# Altium PCB MDriveFinal.PcbDoc
Units mil, origin at the board's own origin, x right, y up, seen from the top; angles counter-clockwise.
Board outline 2550 x 2875 mil, 2 copper layers (Top Layer, Bottom Layer); 24 components, 55 nets, 181 pads, 41 vias.
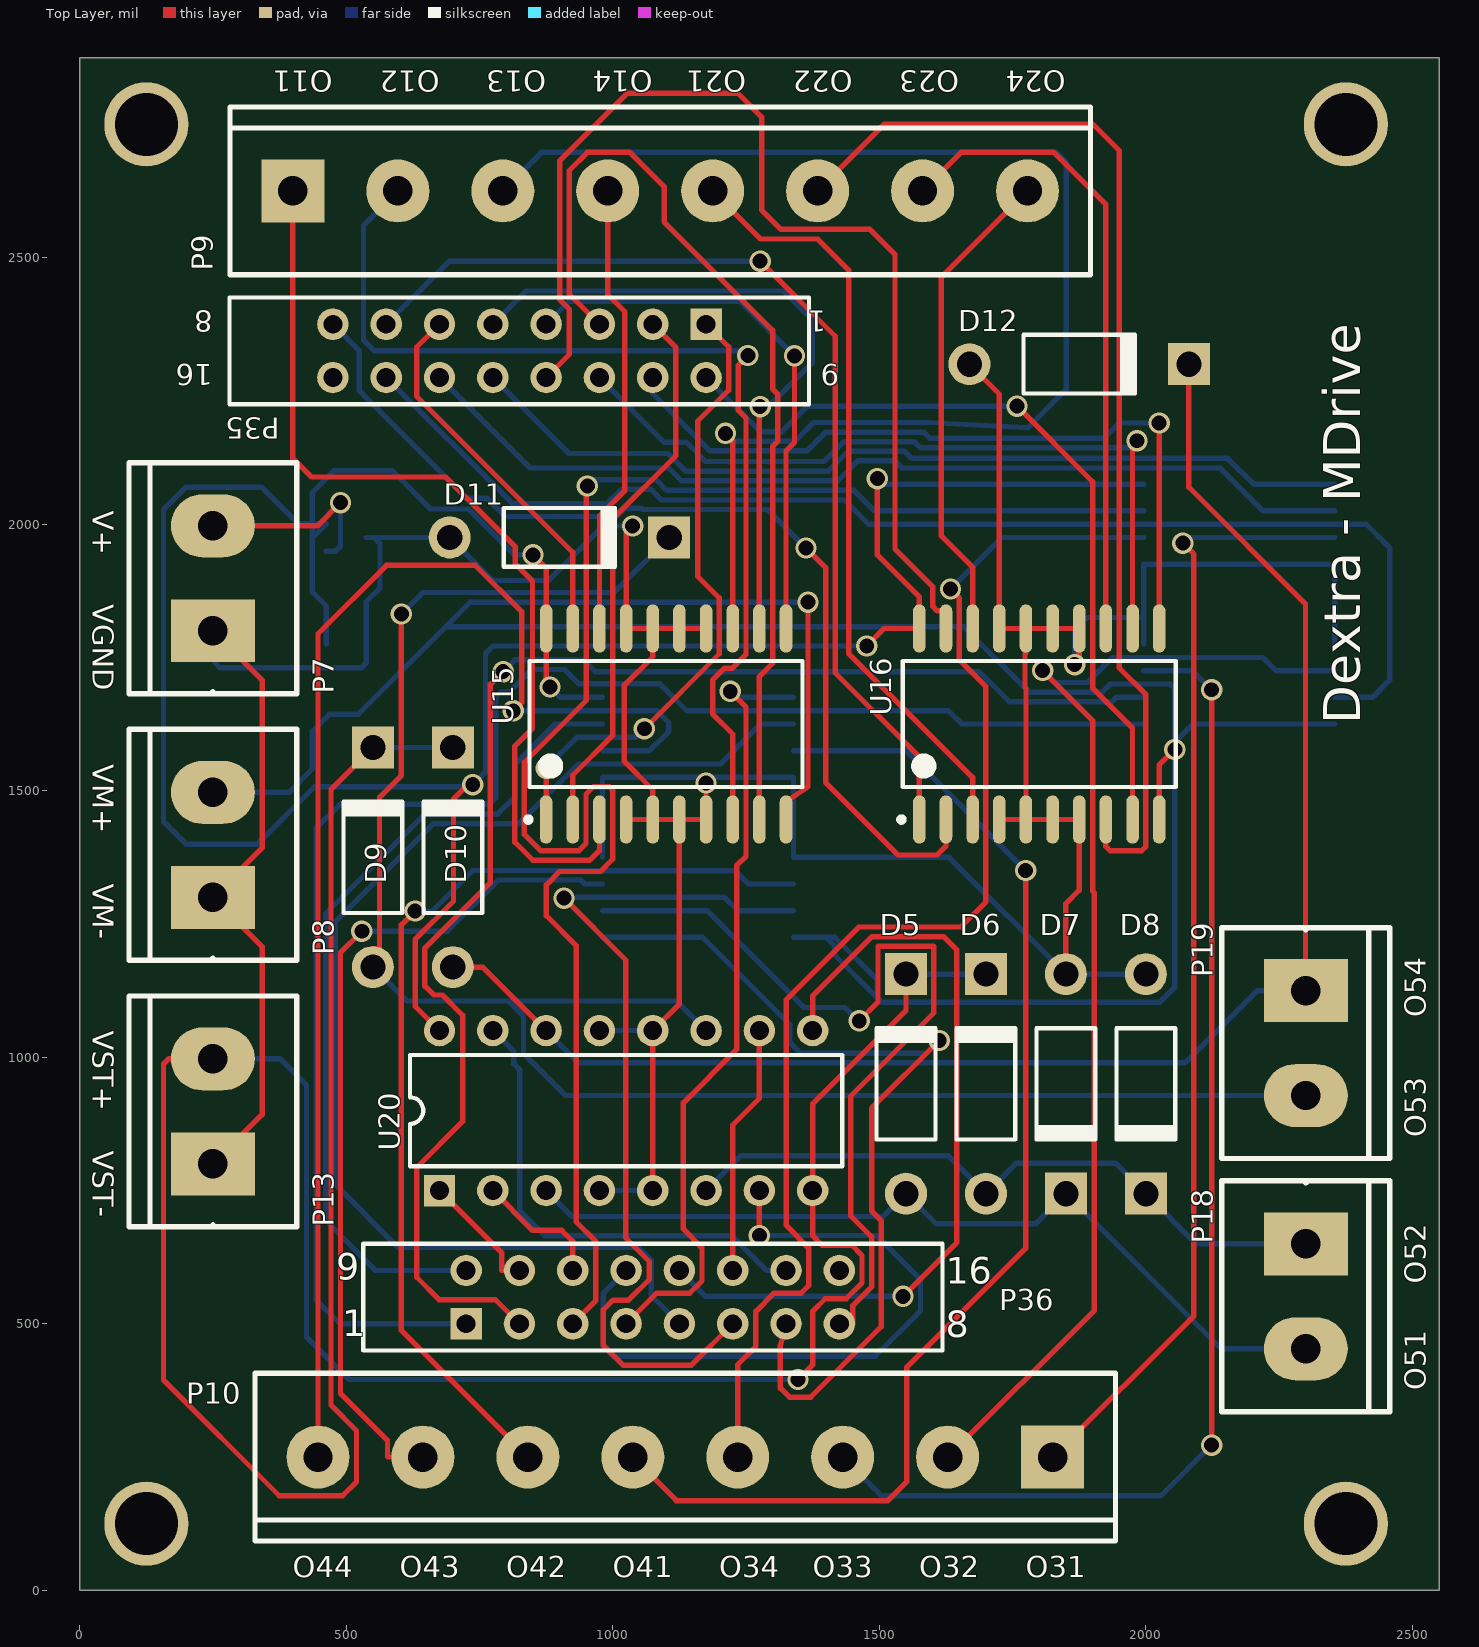
[diagram p0: Top Layer view]
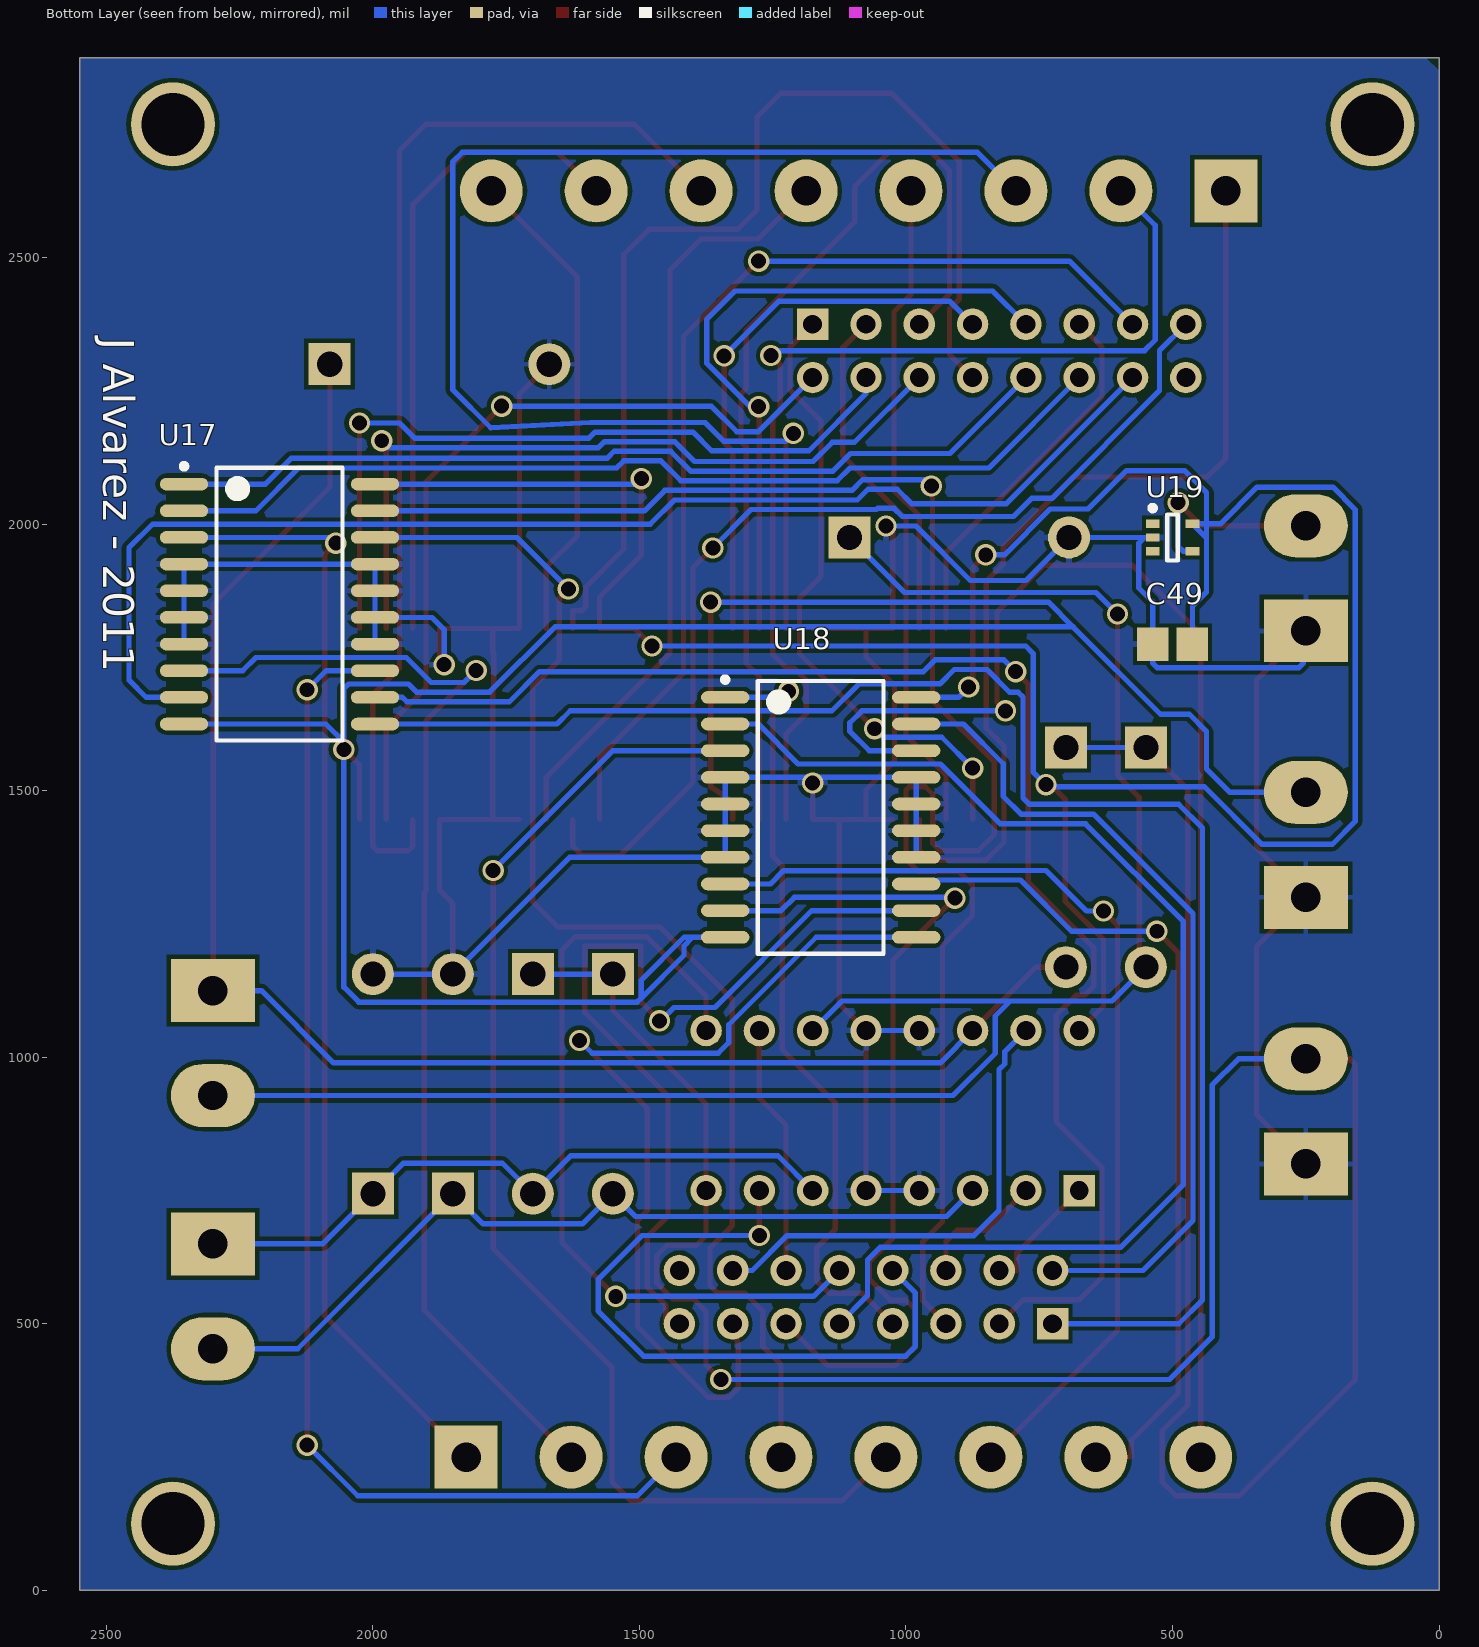
[diagram p1: Bottom Layer view, seen from below]

## Layer stack, top to bottom
Top Layer: signal copper 1.4
Dielectric: dielectric 12.6, FR-4, Dk 4.8
Bottom Layer: signal copper 1.4

## Board outline
0,2875 2550,2875 2550,0 0,0 0,2875

## Design rules (kind name [scope] priority, off if disabled: settings)
Clearance [All] p1: gap=8
HoleSize [All] p1: absolutevalues=TRUE maxlimit=118.11 minlimit=1 maxpercent=80.000 minpercent=20.000
MinimumSolderMaskSliver [All] p1: minsoldermaskwidth=4
PolygonConnect [All] p1: connectstyle=Relief reliefconductorwidth=10 reliefentries=4 polygonreliefangle="90 Angle"
RoomDefinition MDrive [InComponentClass('MDrive')] p1: confinementstyle=ConfineIn formatcopy=TRUE lockcomponents=FALSE outline 0,0 2550,0 2550,2875 0,2875
RoutingVias [All] p1: holewidth=28 width=40 viastyle="Through Hole" minholewidth=28 minwidth=40 maxholewidth=28 maxwidth=40
SMDNeckDown [All] p1: percent=75.000
SilkToSilkClearance [All] p1: silktosilkclearance=3
SilkscreenOverComponentPads [All] p1: minsilkscreentomaskgap=4
SolderMaskExpansion [All] p1: expansion=4
ViasUnderSMD [All] p1: allowed=FALSE
Width [All] p1: maxlimit=10 minlimit=8 preferedwidth=10
Width Width_VGND [InNet('VGND')] p2: maxlimit=15 minlimit=10 preferedwidth=10
Width Width_M [InNet('VM+')] p3: maxlimit=15 minlimit=10 preferedwidth=10
Width Width_S [InNet('VSTP+')] p4: maxlimit=15 minlimit=10 preferedwidth=10
24 further rules are at their usual default settings.

## Components (designator, comment, footprint, x,y, rotation, side; value= is the part's Value field where it differs from the comment)
C49 "Cap Semi" CAPC2012M 500,1775 r0 bottom
D5 "Diode 1N4002" DO-41 1550,950 r90 top
D6 "Diode 1N4002" DO-41 1700,950 r90 top
D7 "Diode 1N4002" DO-41 1850,950 r270 top
D8 "Diode 1N4002" DO-41 2000,950 r270 top
D9 "Diode 1N4002" DO-41 550,1375 r90 top
D10 "Diode 1N4002" DO-41 700,1375 r90 top
D11 "Diode 1N4002" DO-41 900,1975 r0 top
D12 "Diode 1N4002" DO-41 1875,2300 r0 top
P7 "VIN" AZUL5-2 250,1800 r90 top
P8 "VMDC" AZUL5-2 250,1300 r90 top
P9 "Motor 1-4" AZUL5-8 400,2625 r0 top
P10 "Motor 2-8" AZUL5-8 1825,250 r180 top
P13 "VSTP" AZUL5-2 250,800 r90 top
P18 "STPAB" AZUL5-2 2300,650 r270 top
P19 "STPCD" AZUL5-2 2300,1125 r270 top
P35 "SHEADER 2x8" "SHBH 2X8" 1175,2375 r180 top
P36 "SHEADER 2x8" "SHBH 2X8" 725,500 r0 top
U15 "L293DD" SO20_N 1100,1625 r90 top
U16 "L293DD" SO20_N 1800,1625 r90 top
U17 "L293DD" SO20_N 2175,1850 r180 bottom
U18 "L293DD" SO20_N 1160,1450 r180 bottom
U19 "TPS71550" SOT353-5L 500,1975 r180 bottom
U20 "L293B" DIP16 1025,900 r0 top

## Footprints (in the part's own frame and the unit in brackets; to place one, negate y for a bottom-side part, rotate by r counter-clockwise, add the part's x,y. Pads: shape width x height; smd on the part's side, far side on the other; paste and mask are expansions set on the pad)
AZUL5-2 [mm]
  rect 3x4 hole 1.4: 1(0,0)
  oval 3x4 hole 1.4: 2(5,0)
  silkscreen extent -3,-4 8,4
AZUL5-8 [mm]
  rect 3x3 hole 1.4: 1(0,0)
  round 3 hole 1.4: 2(5,0) 3(10,0) 4(15,0) 5(20,0) 6(25,0) 7(30,0) 8(35,0)
  silkscreen extent -3,-4 38,4
CAPC2012M [mm] "Chip Capacitor, Body 2.0x1.3mm, IPC Low Density"
  rect 1.5x1.6 smd: 1(-0.95,0) 2(0.95,0)
  body extent -1.1,-0.72 1.1,0.72, height 1.1
DIP16 [mm] "DIP; 16 Leads; Row Spacing 7.62 mm; Pitch 2.54 mm"
  rect 1.5x1.5 hole 0.9: 1(-8.89,-3.81)
  round 1.5 hole 0.9: 2(-6.35,-3.81) 3(-3.81,-3.81) 4(-1.27,-3.81) 5(1.27,-3.81) 6(3.81,-3.81) 7(6.35,-3.81) 8(8.89,-3.81) 9(8.89,3.81) 10(6.35,3.81) 11(3.81,3.81) 12(1.27,3.81) 13(-1.27,3.81) 14(-3.81,3.81) 15(-6.35,3.81) 16(-8.89,3.81)
  silkscreen extent -10.3,-2.65 10.3,2.65
DO-41 [mm] "Diode, Axial; Body 5.2 x 2.7 mm (LxDia. max), Lead Dia. 0.86 mm (max)"
  round 2 hole 1.2: 1(-5.23,0)
  rect 2x2 hole 1.2: 2(5.23,0)
  silkscreen extent -2.65,-1.4 2.75,1.4
"SHBH 2X8" [mm] "Shrouded Box Header: 2x8-Pin, 0.100\" (2.54 mm) Male"
  rect 1.5x1.5 hole 0.9: 1(0,0)
  round 1.5 hole 0.9: 2(2.54,0) 3(5.08,0) 4(7.62,0) 5(10.16,0) 6(12.7,0) 7(15.24,0) 8(17.78,0) 9(0,2.54) 10(2.54,2.54) 11(5.08,2.54) 12(7.62,2.54) 13(10.16,2.54) 14(12.7,2.54) 15(15.24,2.54) 16(17.78,2.54)
  silkscreen extent -4.9,-1.27 22.7,3.81
SO20_N [mm] "SOIC, 20-Leads, Body 12.8x7.5mm, Pitch 1.27mm, IPC Medium Density"
  oval 2.3x0.6 smd: 1(-4.55,5.715) 2(-4.55,4.445) 3(-4.55,3.175) 4(-4.55,1.905) 5(-4.55,0.635) 6(-4.55,-0.635) 7(-4.55,-1.905) 8(-4.55,-3.175) 9(-4.55,-4.445) 10(-4.55,-5.715) 11(4.55,-5.715) 12(4.55,-4.445) 13(4.55,-3.175) 14(4.55,-1.905) 15(4.55,-0.635) 16(4.55,0.635) 17(4.55,1.905) 18(4.55,3.175) 19(4.55,4.445) 20(4.55,5.715)
  silkscreen extent -4.67,-6.5 3,6.69, body extent -3.75,-6.4 3.75,6.4, height 2.65
SOT353-5L [mm] "SOT353, 5-Leads, Body 2x1.3mm, Pitch 0.65mm, Lead Span 2.1mm, IPC High Density"
  rect 0.65x0.4 smd: 1(-0.95,0.65) 2(-0.95,0) 3(-0.95,-0.65) 4(0.95,-0.65) 5(0.95,0.65)
  silkscreen extent -1.07,-1.1 0.25,1.52, body extent -0.7,-1.1 0.7,1.1, height 1.1

## Part data
C49: "Capacitor (Semiconductor SIM Model)"
D5 D6 D7 D8 D9 D10 D11 D12: "1 Amp General Purpose Rectifier"
P7 P8 P13 P18 P19: library part "Header 2", "Header, 2-Pin"
P9 P10: library part "Header 8", "Header, 8-Pin"
P35 P36: library part "SB Header 2x8", "Shrouded Box Header: 2x8-Pin, 0.100\" (2.54 mm) Male"
U15 U16 U17 U18: "Push-Pull Four Channel Driver With Diode"
U20: "Push-Pull Four Channel Drivers"

## Free pads (board coordinates)
  round 157.48 hole 118.11: 17(125,2750) 18(125,125) 19(2375,125) 19(2375,2750)

## Via types
v1: diameter 40, hole 28, Top Layer to Bottom Layer, 41 vias

## Nets (pads, with @x,y where several pads share a name; then routed paths per layer and width w, separated by ;. In a path a pad name is that pad's centre, name@x,y a point inside that pad or via, vN(x,y) a via of type N, cw(c..) or ccw(c..) an arc to the next point about the centre after c; other vN are vias at no path point)
EN11: P35.1 U15.1 | length 1186.7
  Top Layer w10: U15.1 v1(875,1542.37) ; v1(1059.19,1616.19) 1199.81,1756.81 1199.81,1861.72 1159.49,1902.04 1159.49,2193.34 1217.53,2251.37 1217.53,2332.47 P35.1
  Bottom Layer w10: v1(875,1542.37) 932.82,1600.19 1043.19,1600.19 v1(1059.19,1616.19)
EN12: P35.4 U15.11 | length 1044.7
  Top Layer w10: U15.11 1325,2137.37 1341,2153.37 v1(1341,2315.74)
  Bottom Layer w10: P35.4 918.37,2418.37 1238.37,2418.37 v1(1341,2315.74)
EN21: P35.7 U16.1 | length 1921.6
  Top Layer w10: v1(1276.4,2493.37) 1417.37,2352.4 1417.37,1721 1575,1563.37 U16.1
  Bottom Layer w10: P35.7 693.37,2493.37 v1(1276.4,2493.37)
EN22: P35.10 U16.11 | length 1441.3
  Top Layer w10: U16.11 v1(2025,2189.71)
  Bottom Layer w10: P35.10 1075,2244.79 1182.42,2137.37 1364.35,2137.37 1399.61,2172.63 1583.37,2172.63 1594.63,2161.37 1921.66,2161.37 1950,2189.71 v1(2025,2189.71)
EN31: P35.13 U17.1 | length 1692.8
  Bottom Layer w10: P35.13 917.63,2132.37 1103.74,2132.37 1136.74,2099.37 1404.19,2099.37 1441.46,2136.63 1547.37,2136.63 1560.63,2123.37 2153.37,2123.37 2201.74,2075 U17.1
EN32: P36.1 U17.11 | length 3013.5
  Bottom Layer w10: P36.1 488.37,500 443.63,544.74 443.63,1429.63 488.37,1474.37 768.37,1474.37 780.37,1486.37 780.37,1675.37 789.64,1684.64 805.64,1684.64 848.37,1727.37 909.37,1727.37 936.37,1700.37 1088.37,1700.37 1138.74,1650 1629.74,1650 1654.74,1625 U17.11
EN41: P36.4 U18.1 | length 1480.5
  Top Layer w10: P36.4 1082.47,557.47 1144.37,557.47 1167.53,580.63 1167.53,642.53 1132.37,677.69 1132.37,914.37 1232.37,1014.37 1232.37,1359.37 1249.81,1376.81 1249.81,1656.93 v1(1220.37,1686.37)
  Bottom Layer w10: v1(1220.37,1686.37) 1231.74,1675 U18.1
EN42: P36.7 U18.11 | length 1720.9
  Top Layer w10: P36.7 1314.37,459.74 1314.37,379.37 1331.37,362.37 1371.37,362.37 1503.53,494.53 1503.53,693.47 1485.53,711.47 1485.53,904.53 v1(1612.37,1031.37)
  Bottom Layer w10: U18.11 1168.37,1225 1332.37,1061 1332.37,1027.47 1352.37,1007.47 1588.47,1007.47 v1(1612.37,1031.37)
EN51: P36.10 U20.1 | length 231.5
  Top Layer w10: U20.1 792,633 792,600 P36.10
EN52: P36.13 U20.9 | length 1522.9
  Top Layer w10: U20.9 1375,1114.64 1486.64,1226.28 1620.37,1226.28 1645.37,1201.28 1645.37,652.37 v1(1544.37,551.37)
  Bottom Layer w10: P36.13 1173.63,551.37 v1(1544.37,551.37)
IN11: P35.2 U15.2 | length 1027.2
  Top Layer w10: U15.2 925,1528.89 999.81,1603.7 999.81,2009.65 1118.37,2128.21 1118.37,2331.63 P35.2
IN12: P35.3 U15.9 | length 1820.4
  Top Layer w10: P35.3 918.37,2431.63 918.37,2663.37 952.37,2697.37 1032.37,2697.37 1096.29,2633.45 1096.29,2567.03 1299.81,2363.5 1299.81,2253.37 1309.37,2243.81 1309.37,2155.37 1299.81,2145.81 1299.81,1739 1275,1714.18 U15.9
IN13: P35.5 U15.12 | length 1277
  Top Layer w10: U15.12 1275,2219 v1(1276.37,2220.37)
  Bottom Layer w10: P35.5 837.37,2437.37 1320.37,2437.37 1374,2383.74 1374,2302 1292.37,2220.37 v1(1276.37,2220.37)
IN14: P35.6 U15.19 | length 709.7
  Top Layer w10: P35.6 632.37,2332.37 632.37,2239.62 925,1946.99 U15.19
IN21: P35.8 U16.2 | length 1911.9
  Top Layer w10: v1(1362.37,1955.37) 1399.37,1918.37 1399.37,1515.37 1535.37,1379.37 1608.37,1379.37 1625,1396 U16.2
  Bottom Layer w10: P35.8 524.37,2325.63 524.37,2250.37 726.32,2048.42 764.47,2048.42 798.52,2014.37 1007.02,2014.37 1022.17,2029.52 1053.37,2029.52 1055.52,2027.37 1290.37,2027.37 v1(1362.37,1955.37)
IN22: P35.9 U16.9 | length 1510.6
  Top Layer w10: v1(1758.37,2221.37) 1900.19,2079.55 1900.19,1692.37 1975,1617.56 U16.9
  Bottom Layer w10: P35.9 1276.63,2173.37 1317.37,2173.37 1365.37,2221.37 v1(1758.37,2221.37)
IN23: P35.11 U16.12 | length 1454.8
  Top Layer w10: U16.12 1975,2148 v1(1983.37,2156.37)
  Bottom Layer w10: P35.11 1096.48,2153.52 1138.04,2153.52 1174.19,2117.37 1396.6,2117.37 1433.86,2154.63 1565.37,2154.63 1576.63,2143.37 1970.37,2143.37 v1(1983.37,2156.37)
IN24: P35.12 U16.19 | length 2091.8
  Top Layer w10: P35.12 918.37,2318.37 918.37,2403.37 900.37,2421.37 900.37,2681.37 1027.37,2808.37 1234.37,2808.37 1279.37,2763.37 1279.37,2589.37 1315.8,2552.94 1482.37,2552.94 1529.37,2505.94 1529.37,1953.37 1600.37,1882.37 1600.37,1845.37 1608.37,1837.37 1625,1837.37 U16.19
IN31: P35.14 U17.2 | length 1813.6
  Bottom Layer w10: P35.14 844.63,2105.37 1105.02,2105.37 1129.02,2081.37 1422.19,2081.37 1459.46,2118.63 1529.37,2118.63 1542.63,2105.37 2139.37,2105.37 2219.74,2025 U17.2
IN32: P35.15 U17.9 | length 2402
  Bottom Layer w10: P35.15 811.63,2038.37 989.37,2038.37 1016.37,2065.37 1071.37,2065.37 1091.37,2045.37 1434.37,2045.37 1479.93,1999.81 2413.37,1999.81 2457.37,1955.81 2457.37,1707.37 2425,1675 U17.9
IN33: P36.2 U17.12 | length 2746.4
  Top Layer w10: v1(794.37,1723.37) 770.37,1699.37 770.37,1327.47 647.63,1204.72 647.63,1133.46 664.37,1116.72 680.37,1116.72 718.37,1078.72 718.37,879.37 632.37,793.37 632.37,587.37 674.37,545.37 779.63,545.37 P36.2
  Bottom Layer w10: v1(794.37,1723.37) 816.37,1745.37 945.22,1745.37 967.22,1723.37 1687.37,1723.37 1743.88,1666.86 1936.19,1666.86 1944.33,1675 U17.12
IN34: P36.3 U17.19 | length 3213.7
  Top Layer w10: P36.3 968.37,543.37 968.37,654.37 931.37,691.37 931.37,1209.37 875.37,1265.37 875.37,1323.37 900.37,1348.37 976.81,1348.37 999.81,1371.37 999.81,1501.42 993.86,1507.37 963.83,1507.37 949.81,1493.36 949.81,1401.03 936.37,1387.59 864.37,1387.59 834.26,1417.7 834.26,1553.3 950.19,1669.22 950.19,2069.19 v1(952.37,2071.37)
  Bottom Layer w10: v1(952.37,2071.37) 964.37,2083.37 1081.02,2083.37 1101.02,2063.37 1452.37,2063.37 1490.74,2025 U17.19
IN41: P36.5 U18.2 | length 2299
  Bottom Layer w10: P36.5 1072.11,552.89 1072.11,619.63 1048.37,643.37 597.37,643.37 479.63,761.11 479.63,1254.5 662.99,1437.86 822.86,1437.86 935.19,1550.19 1202.19,1550.19 1277,1625 U18.2
IN42: P36.6 U18.9 | length 1690.5
  Top Layer w10: v1(908.37,1298.37) 1024.37,1182.37 1024.37,660.77 1068.71,616.43 1068.71,583.57 1029.51,544.37 1000.37,544.37 982.37,526.37 982.37,459.37 1019.78,421.96 1146.96,421.96 P36.6
  Bottom Layer w10: v1(908.37,1298.37) 910,1300 1209.37,1300 1234.37,1275 U18.9
IN43: P36.8 U18.12 | length 1655.5
  Top Layer w10: P36.8 1450.37,500 1450.37,534.02 1485.53,569.17 1485.53,663.21 1446.37,702.37 1446.37,927.37 1602.37,1083.37 1602.37,1208.28 1497.37,1208.28 1497.37,1103.37 v1(1462.37,1068.37)
  Bottom Layer w10: U18.12 1176.74,1275 1358.37,1093.37 1435.37,1093.37 1460.37,1068.37 v1(1462.37,1068.37)
IN44: P36.9 U18.19 | length 1580.2
  Bottom Layer w10: P36.9 555.32,600 461.63,693.69 461.63,1269.37 648.18,1455.92 784.05,1455.92 817.5,1489.37 817.5,1550.5 892,1625 U18.19
IN51: P36.11 U20.2 | length 244.2
  Top Layer w10: U20.2 849.63,675.37 904.37,675.37 925,654.74 P36.11
IN52: P36.12 U20.7 | length 1277.7
  Top Layer w10: v1(1275,665.74) U20.7
  Bottom Layer w10: P36.12 982.37,557.37 982.37,457.37 1000.37,439.37 1492.37,439.37 1577.37,524.37 1577.37,583.37 1495,665.74 v1(1275,665.74)
IN53: P36.14 U20.10 | length 470.7
  Top Layer w10: P36.14 1225,873 1275,923 U20.10
IN54: P36.15 U20.15 | length 904.7
  Bottom Layer w10: U20.15 814.47,1010.53 814.47,987.71 825.37,976.81 825.37,712.37 872.37,665.37 1223,665.37 1288.37,600 P36.15
OUT11: P9.1 U15.3 | length 1807.2
  Top Layer w10: P9.1 400,2123.37 435,2088.37 686.37,2088.37 817.37,1957.37 817.37,1925.37 849.37,1893.37 849.37,1616.88 816.26,1583.78 816.26,1403.3 849.97,1369.59 957,1369.59 975,1387.59 U15.3
OUT12: P9.2 U15.8 | length 1973.1
  Top Layer w10: U15.8 1225,1606.37 1187.37,1644 1187.37,1707.37 1209.81,1729.81 1224.37,1729.81 1249.81,1755.25 1249.81,2198.93 1235.53,2213.21 1235.53,2298.53 v1(1253.37,2316.37)
  Bottom Layer w10: P9.2 532.37,2560.52 532.37,2345.37 552.37,2325.37 1244.37,2325.37 v1(1253.37,2316.37)
OUT13: P9.3 U15.13 | length 2582.7
  Top Layer w10: v1(1211.37,2170.37) 1225,2156.74 U15.13
  Bottom Layer w10: P9.3 866.07,2697.37 1832.37,2697.37 1850.37,2679.37 1850.37,2252.29 1778.92,2180.84 1591.58,2190.63 1376.63,2190.63 1341.37,2155.37 1226.37,2155.37 v1(1211.37,2170.37)
OUT14: P9.4 U15.18 | length 853.9
  Top Layer w10: U15.18 975,2015.75 1022.62,2063.37 1022.62,2398.3 990.55,2430.37 P9.4
OUT21: P9.5 U16.3 | length 1443.7
  Top Layer w10: P9.5 1277.46,2534.94 1384.37,2534.94 1442.57,2476.74 1442.57,1757.53 1675,1525.1 U16.3
OUT22: P9.6 U16.8 | length 2096.4
  Top Layer w10: P9.6 1509.62,2750.37 1900.37,2750.37 1950,2700.74 1950,1730.37 2000,1680.37 2000,1395.37 1992,1387.37 1933,1387.37 1925,1395.37 U16.8
OUT23: P9.7 U16.13 | length 1209.9
  Top Layer w10: P9.7 1653.47,2697.37 1827.37,2697.37 1925,2599.74 U16.13
OUT24: P9.8 U16.18 | length 912.1
  Top Layer w10: U16.18 1675,1919.37 1616.37,1978 1616.37,2463.42 P9.8
OUT31: P10.1 U17.3 | length 2121.8
  Top Layer w10: P10.1 2090,515 2090,1943.74 v1(2069.37,1964.37)
  Bottom Layer w10: v1(2069.37,1964.37) 2080,1975 U17.3
OUT32: P10.2 U17.8 | length 2216.4
  Top Layer w10: P10.2 1903.37,525.22 1903.37,1308.37 1900.19,1311.55 1900.19,1631.55 v1(1806.37,1725.37)
  Bottom Layer w10: v1(1806.37,1725.37) 1828.88,1702.86 1890.42,1702.86 1937.37,1749.81 2219.56,1749.81 2244.37,1725 U17.8
OUT33: P10.3 U17.13 | length 2320.8
  Top Layer w10: v1(2123.37,272.37) v1(2123.37,1689.37)
  Bottom Layer w10: P10.3 1503.93,177.37 2028.37,177.37 v1(2123.37,272.37) ; U17.13 2087.74,1725 v1(2123.37,1689.37)
OUT34: P10.4 U17.18 | length 2427.8
  Top Layer w10: P10.4 1234.45,423.45 1268.37,457.37 1268.37,523.37 1302.47,557.47 1353.63,557.47 1367.53,571.37 1367.53,642.53 1325.63,684.43 1325.63,1108.28 1461.63,1244.28 1652.72,1244.28 1699.81,1291.37 1699.81,1695.75 1650.19,1745.37 1650.19,1861.55 v1(1633.37,1878.37)
  Bottom Layer w10: v1(1633.37,1878.37) 1730,1975 U17.18
OUT41: P10.5 U18.3 | length 2329.7
  Top Layer w10: P10.5 1119.23,168.37 1516.37,168.37 1551.37,203.37 1551.37,418.37 1774.37,641.37 v1(1774.37,1350.37)
  Bottom Layer w10: U18.3 1549.74,1575 v1(1774.37,1350.37)
OUT42: P10.6 U18.8 | length 1885.2
  Top Layer w10: v1(629.37,1274.37) 603.37,1248.37 603.37,487.38 P10.6
  Bottom Layer w10: v1(629.37,1274.37) 661.37,1274.37 737.37,1350.37 944.19,1350.37 944.56,1350 1229.37,1350 1254.37,1325 U18.8
OUT43: P10.7 U18.13 | length 1600.2
  Top Layer w10: v1(529.37,1236.37) 489.37,1196.37 489.37,369.37 577.37,281.37 577.37,250 P10.7
  Bottom Layer w10: v1(529.37,1236.37) 689.37,1236.37 785.37,1332.37 940,1332.37 947.37,1325 U18.13
OUT44: P10.8 U18.18 | length 2664.6
  Top Layer w10: P10.8 447.05,1794.31 575.37,1922.63 742.11,1922.63 829.37,1835.37 829.37,1665.81 v1(813.37,1649.81)
  Bottom Layer w10: v1(813.37,1649.81) 1082.75,1649.81 1105.19,1627.37 1105.19,1611.37 1068.82,1575 U18.18
OUT51: D5.1 D7.2 P18.2 U20.3 | length 1630.3
  Bottom Layer w10: U20.3 923.63,701.37 1507.28,701.37 D5.1 1606.72,687.37 1793.28,687.37 D7.2 2140.94,453.15 P18.2
OUT52: D6.1 D8.2 P18.1 U20.6 | length 1268.1
  Bottom Layer w10: U20.6 1240.49,815.49 1628.6,815.49 D6.1 1757.28,801.37 1942.72,801.37 D8.2 2094.09,650 P18.1
OUT53: D9.1 D11.2 P19.2 U20.11 | length 3538
  Top Layer w10: D9.1 550,1203.37 562.37,1203.37 562.37,1487.37 603.37,1528.37 v1(603.37,1831.37)
  Bottom Layer w10: D9.1 613.72,1105.37 804.37,1105.37 ; v1(603.37,1831.37) 643.73,1871.73 1002.64,1871.73 D11.2 ; U20.11 1119.63,1105.37 804.37,1105.37 ; P19.2 911.69,928.15 832.47,1007.37 832.47,1077.27 804.37,1105.37
OUT54: D10.1 D12.2 P19.1 U20.14 | length 2997.4
  Top Layer w10: D10.1 755.91,1169.09 U20.14 ; D12.2 2080.37,2300 2080.37,2069.37 2299.37,1850.37 2299.37,1125 P19.1
  Bottom Layer w10: U20.14 935.53,989.47 2073.47,989.47 2209,1125 P19.1
V+: P7.2 U19.4 | length 369.9
  Top Layer w10: P7.2 445.85,1996.85 v1(489.37,2040.37)
  Bottom Layer w10: U19.4 480.37,1949.41 489.37,1958.41 v1(489.37,2040.37)
VCC: C49.1 U15.20 U16.20 U17.20 U18.20 U19.5 U20.16 | length 5213.7
  Top Layer w10: U20.16 629.37,1095.63 629.37,1220.6 701.37,1292.6 701.37,1484.37 728.37,1511.37 v1(737.37,1511.37) v1@733.37,1507.37 ; v1(850.37,1942.37) 875,1917.74 U15.20 875,1701.74 v1(882.37,1694.37) ; v1(1476.37,1771.37) 1509.13,1804.13 U16.20 1575,1863.37 1496.37,1942 v1(1496.37,2085.37)
  Bottom Layer w10: C49.1 462.6,1846.14 436.37,1872.37 436.37,1974.36 ; v1@733.37,1507.37 440.37,1507.37 332.37,1399.37 200.37,1399.37 157.37,1442.37 157.37,2027.37 199.37,2069.37 341.37,2069.37 410.15,2000.59 436.37,2000.59 ; v1(737.37,1511.37) 761.37,1535.37 761.37,1757.37 775.37,1771.37 v1(1476.37,1771.37) ; v1(850.37,1942.37) 815.47,1942.37 729.47,2028.37 658.37,2028.37 586.37,2100.37 477.37,2100.37 436.37,2059.37 436.37,2000.59 ; v1(882.37,1694.37) 901.74,1675 U18.20 ; v1(1496.37,2085.37) 1506.74,2075 U17.20 ; 436.37,1974.36 436.37,2000.59 ; 436.37,1974.36 U19.5 436.37,2000.59
VGND: C49.2 D7.1 D8.1 D11.1 D12.1 P7.1 P8.1 P13.1 U15.4 U15.5 U15.6 U15.7 U15.14 U15.15 U15.16 U15.17 U16.4 U16.5 U16.6 U16.7 U16.14 U16.15 U16.16 U16.17 U17.4 U17.5 U17.6 U17.7 U17.14 U17.15 U17.16 U17.17 U18.4 U18.5 U18.6 U18.7 U18.14 U18.15 U18.16 U18.17 U19.2 U20.4 U20.5 U20.12 U20.13 | length 8058.3
  Top Layer w10: P13.1 342.37,892.37 342.37,1207.63 P8.1 342.37,1392.37 342.37,1707.63 P7.1 ; U15.4 U15.5 ; v1(1037.37,1996.37) 1025,1984 U15.17 U15.16 ; U20.5 U20.12 1125,1100 U15.6 ; v1(1175,1514.37) U15.7 U15.6 ; U15.14 U15.15 U15.16 ; D12.1 1725,2244.09 U16.17 U16.16 ; U16.4 U16.5 ; D7.1 1850,1288.37 1875,1313.37 U16.7 U16.6 U16.5 ; v1(1866.37,1736.37) 1875,1745 U16.14 U16.15 U16.16 ; U15.5 U15.6 ; U15.5 1075,1501.74 1021.37,1555.37 1021.37,1697.37 1075,1751 U15.16 ; U16.5 1775,1692.37 1773.37,1694 1773.37,1756.74 1775,1758.37 U16.16
  Bottom Layer w10: P7.1 254.37,1800 254.37,1739.37 263.34,1730.4 528.43,1730.4 537.4,1739.37 C49.2 537.4,1854.4 563.37,1880.37 563.37,1964 552.37,1975 ; U19.2 552.37,1975 ; U20.4 U20.5 ; U20.13 U20.12 ; U18.14 U18.15 U18.16 U18.17 v1@1185.63,1525 ; v1(1037.37,1996.37) 981.37,1996.37 879.37,1894.37 774.72,1894.37 D11.1 552.37,1975 ; v1(1175,1514.37) v1@1185.63,1525 ; v1(1866.37,1736.37) 1866.37,1802 1889.37,1825 U17.15 ; U17.14 U17.15 ; D8.1 D7.1 1630.91,1375 U18.7 U18.6 U18.5 U18.4 v1@1185.63,1525 ; U17.7 U17.6 U17.5 U17.4 U17.17 U17.16 U17.15
VM+: P8.2 U15.10 U16.10 U17.10 U18.10 | length 5131.7
  Top Layer w10: U15.10 1325,1479.37 1366.37,1507.37 v1(1366.37,1853.6) ; U16.10 2025,1548 v1(2054.37,1577.37)
  Bottom Layer w10: P8.2 392.37,1496.85 436.37,1540.85 436.37,1611.37 468.37,1643.37 522.37,1643.37 686.37,1807.37 ; U18.10 1400.37,1225 ; v1(1366.37,1853.6) 732.6,1853.6 686.37,1807.37 ; U17.10 2088.37,1625 v1@2054.37,1591 ; 686.37,1807.37 1658.37,1807.37 1780.88,1684.86 1918.19,1684.86 1933.52,1700.19 2045.55,1700.19 2054.37,1691.37 v1@2054.37,1591 ; 1400.37,1225 1416.37,1225 1496.37,1145 1496.37,1111.37 ; 1400.37,1225 1416.37,1209 1416.37,1191.37 1496.37,1111.37 ; 1496.37,1111.37 1504.37,1103.37 2026.37,1103.37 2054.37,1131.37 v1(2054.37,1577.37) v1@2054.37,1591
VSTP+: D5.2 D6.2 D9.2 D10.2 P13.2 U20.8 | length 5482
  Top Layer w10: P13.2 166.85,996.85 157.37,987.37 157.37,394.37 374.37,177.37 493.37,177.37 519.37,203.37 519.37,299.37 471.37,347.37 471.37,1502.28 D9.2 ; v1(1347.37,395.37) 1375,423 1375,523.37 1398.57,546.94 1437.84,546.94 1467.53,576.63 1467.53,628.14 1448.37,647.29 1393,647.29 1375,665.29 U20.8 1375,912.55 1550,1087.55 D5.2
  Bottom Layer w10: P13.2 376.37,996.85 425.63,947.59 425.63,475.11 505.37,395.37 v1(1347.37,395.37) ; D9.2 D10.2 ; D5.2 D6.2
pads on no net: P35.16 P36.16 U19.1 U19.3

## Polygon pours and split planes (outlines as drawn)
VGND on Bottom Layer "Bottom Overlay-No Net" (solid, pour order 2): 0,2875 2550,2875 2550,0 0,0 0,2850 25,2875

## Silkscreen, mask and mechanical layers (free items; w line width, h text height)
Top Overlay:
  text "O11" at 475,2850 h39.37 r180
  text "O12" at 675,2850 h39.37 r180
  text "O13" at 875,2850 h39.37 r180
  text "O14" at 1075,2850 h39.37 r180
  text "O21" at 1250,2850 h39.37 r180
  text "O22" at 1450,2850 h39.37 r180
  text "O23" at 1650,2850 h39.37 r180
  text "O24" at 1850,2850 h39.37 r180
  text "V+" at 25,2025 h39.37 r270
  text "VGND" at 25,1850 h39.37 r270
  text "Dextra - MDrive" at 2425,1625 h118.11 r90
  text "VM+" at 25,1550 h39.37 r270
  text "VM-" at 25,1325 h39.37 r270
  text "O54" at 2525,1075 h39.37 r90
  text "VST+" at 25,1050 h39.37 r270
  text "O53" at 2525,850 h39.37 r90
  text "VST-" at 25,825 h39.37 r270
  text "O52" at 2525,575 h39.37 r90
  text "O51" at 2525,375 h39.37 r90
  text "O44" at 400,25 h39.37
  text "O43" at 600,25 h39.37
  text "O42" at 800,25 h39.37
  text "O41" at 1000,25 h39.37
  text "O34" at 1200,25 h39.37
  text "O33" at 1375,25 h39.37
  text "O32" at 1575,25 h39.37
  text "O31" at 1775,25 h39.37
Bottom Overlay:
  text "J Alvarez - 2011" at 2525,2350 h100 r90

## Text inside footprints (layer, text, board x,y; h text height)
P35: Top Overlay "16" at 250,2300 h40 r180; Top Overlay "8" at 250,2400 h40 r180; Top Overlay "1" at 1400,2400 h40 r180; Top Overlay "9" at 1425,2300 h40 r180
P36: Top Overlay "16" at 1625,575 h50; Top Overlay "8" at 1625,475 h50; Top Overlay "1" at 492.72,476.38 h50; Top Overlay "9" at 480.91,582.68 h50